# Altium PCB PCBPCB.PcbDoc
Units mil, origin at the board's own origin, x right, y up, seen from the top; angles counter-clockwise.
Board outline 2900 x 2350 mil, 2 copper layers (Top Layer, Bottom Layer); 24 components, 36 nets, 165 pads, 0 vias.
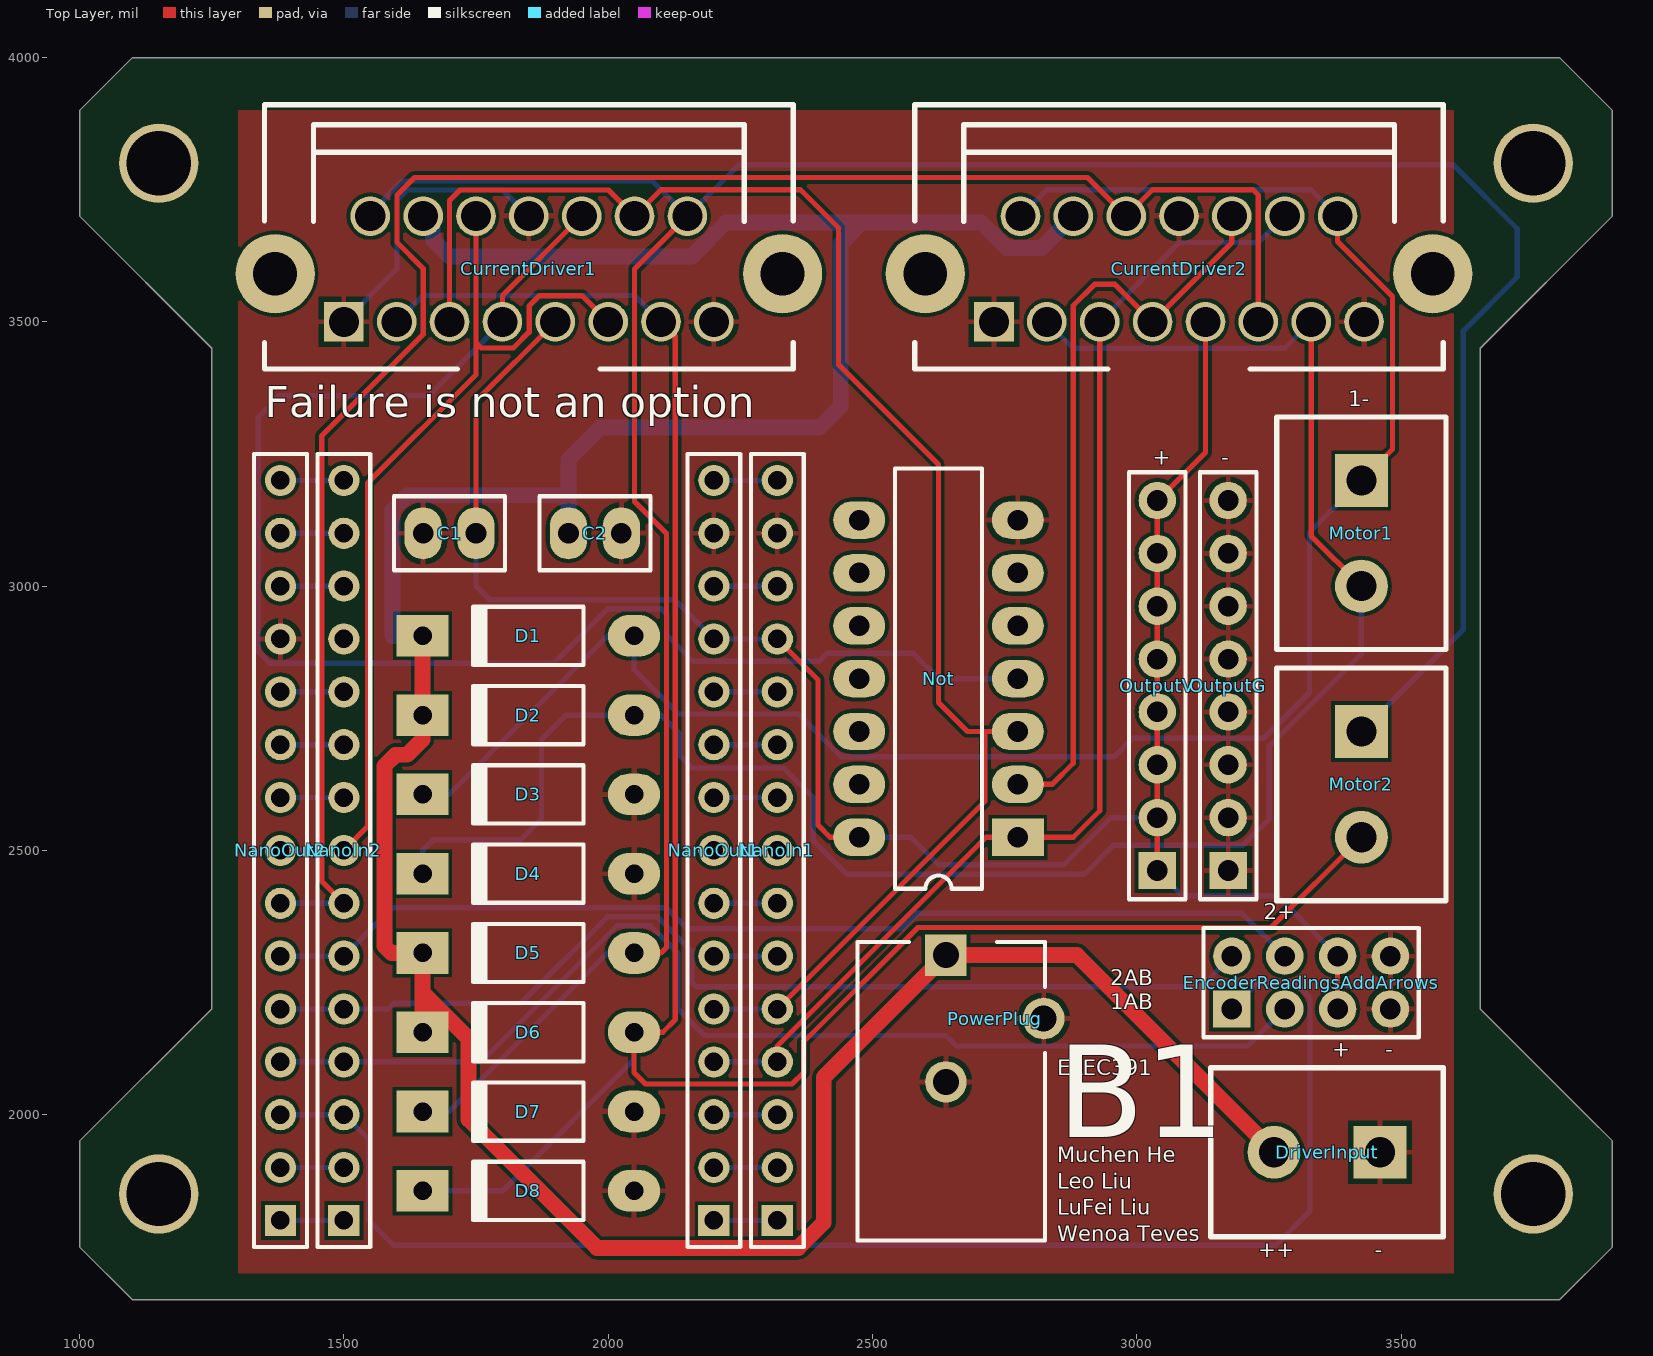
[diagram p0: Top Layer view]
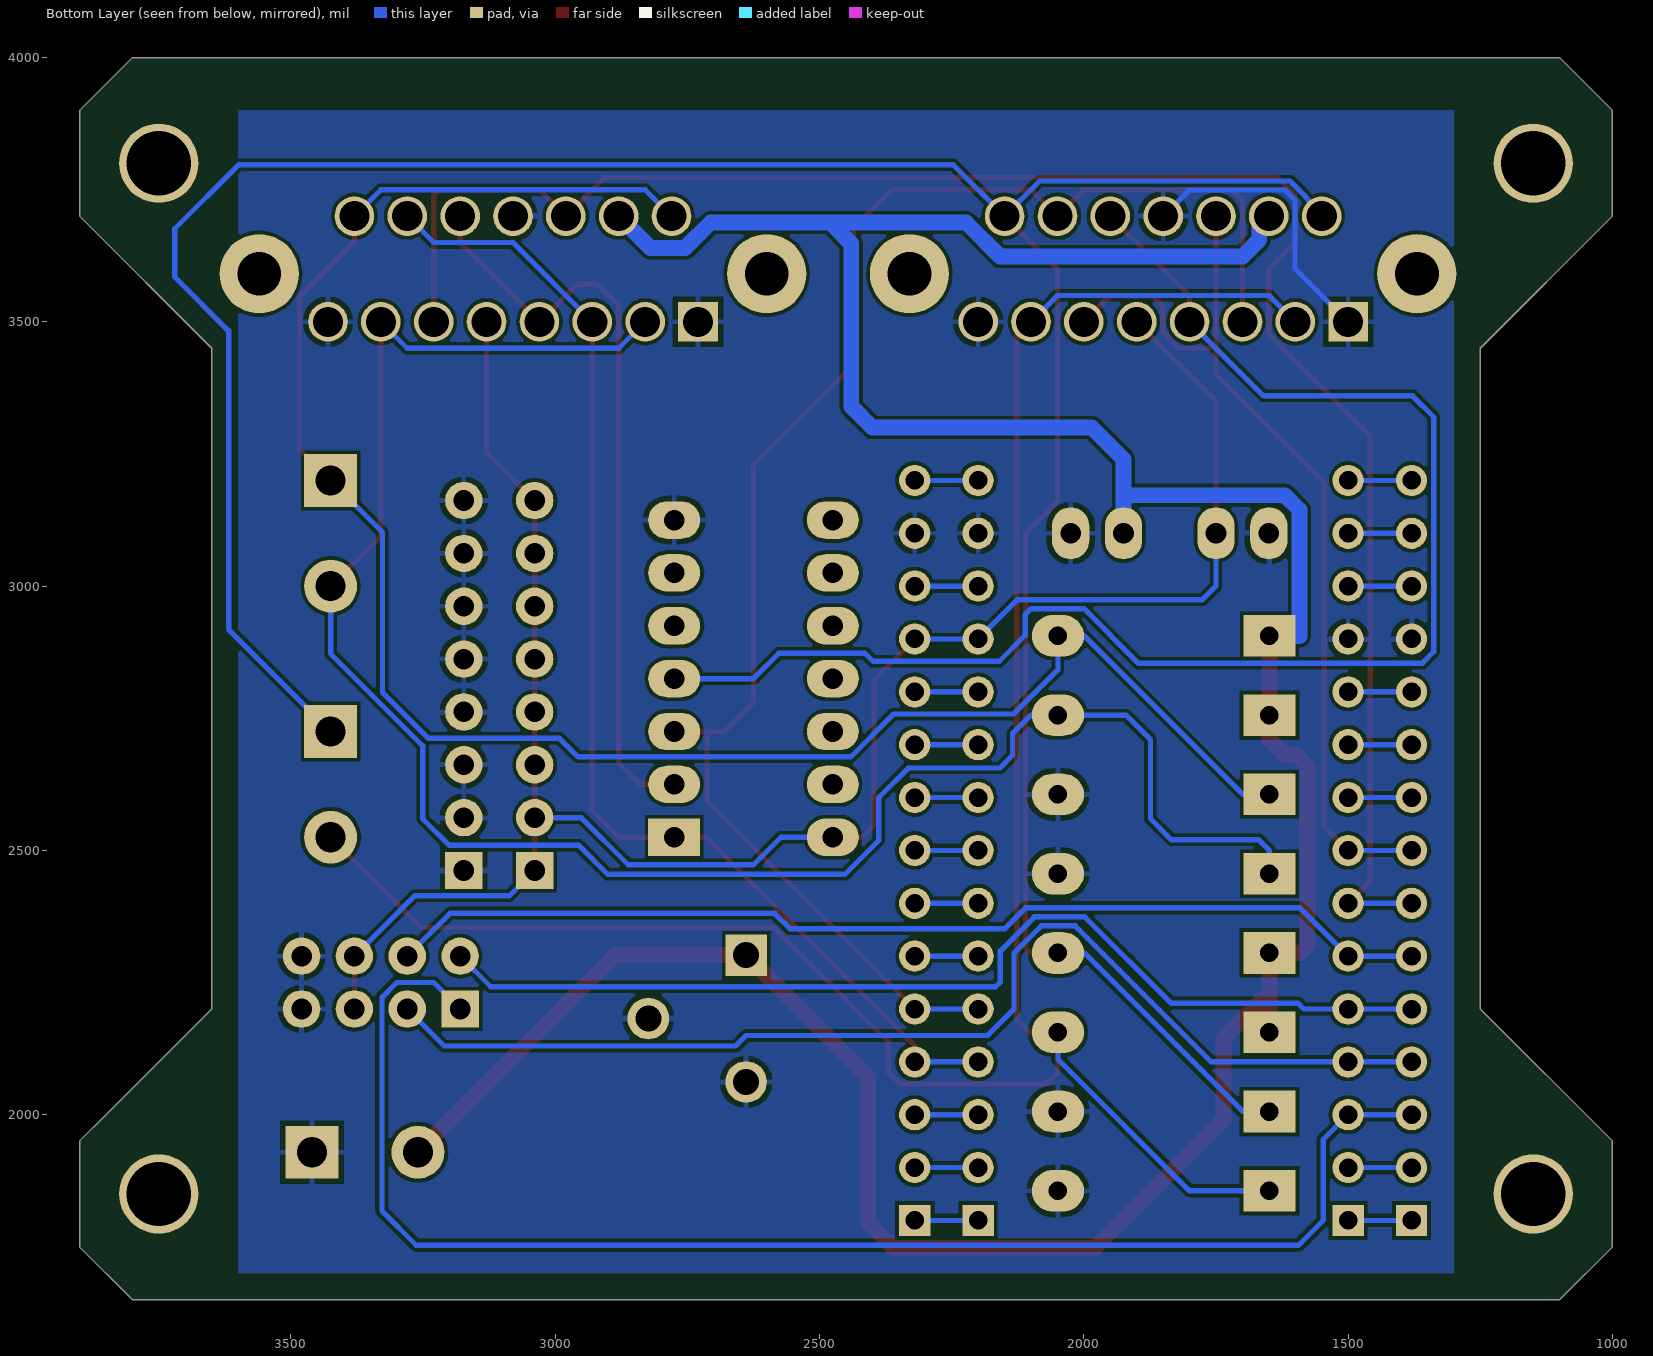
[diagram p1: Bottom Layer view, seen from below]

## Layer stack, top to bottom
Top Solder: solder mask 0.4, Solder Resist, Dk 3.5
Top Layer: signal copper 1.4
Dielectric 1: dielectric 12.6, FR-4, Dk 4.8
Bottom Layer: signal copper 1.4
Bottom Solder: solder mask 0.4, Solder Resist, Dk 3.5

## Board outline
1100,1650 1000,1750 1000,1950 1250,2200 1250,3450 1000,3700 1000,3900 1100,4000 3800,4000 3900,3900 3900,3700 3650,3450 3650,2200 3850,2000 3900,1950 3900,1750 3800,1650

## Design rules (kind name [scope] priority, off if disabled: settings)
AssemblyTestPointUsage [All] p1: valid=2
BoardOutlineClearance [All] p1: gap=10
Clearance [All] p1: gap=7
ComponentClearance [All] p1: gap=0 collisioncheckmode=3 verticalgap=0 showdistances=FALSE
FabricationTestPointUsage [All] p1: valid=2 allowmultiple=FALSE
FabricationTestPointUsage TestPointUsage [All] p2: valid=0 allowmultiple=FALSE
FabricationTestpoint Testpoint [All] p2: side=3 testpointundercomponent=TRUE minsize=40 maxsize=100 preferedsize=60 minholesize=0 maxholesize=40 preferedholesize=32 testpointgrid=1 allowsidetop=TRUE allowsidebottom=TRUE usegrid=TRUE gridtolerance=0.01
Height [All] p1: minheight=0 maxheight=2000 prefheight=500
HoleSize NPTH_withPads [(PadIsPlated = 'False') AND ((HoleDiameter < PadXSize_AllLayers ) OR (HoleDiameter < PadYSize_AllLayers))] p1: absolutevalues=TRUE maxlimit=0 minlimit=0 maxpercent=80.000 minpercent=20.000
HoleSize PadlessThruHole [(PadIsPlated = 'True') And ((HoleDiameter >= PadXSize_AllLayers ) OR (HoleDiameter >= PadYSize_AllLayers))] p2: absolutevalues=TRUE maxlimit=0 minlimit=0 maxpercent=80.000 minpercent=20.000
HoleSize HoleSize20 [HoleSize = 20 AND NOT(PadIsPlated)] p3: absolutevalues=TRUE maxlimit=20 minlimit=20 maxpercent=80.000 minpercent=20.000
HoleSize HoleSize20_p [HoleSize = 17 AND PadIsPlated] p4: absolutevalues=TRUE maxlimit=17 minlimit=17 maxpercent=80.000 minpercent=20.000
HoleSize HoleSize28 [HoleSize = 28 AND NOT(PadIsPlated)] p5: absolutevalues=TRUE maxlimit=28 minlimit=28 maxpercent=80.000 minpercent=20.000
HoleSize HoleSize28_p [HoleSize = 25 AND PadIsPlated] p6: absolutevalues=TRUE maxlimit=25 minlimit=25 maxpercent=80.000 minpercent=20.000
HoleSize HoleSize35 [HoleSize = 35 AND NOT(PadIsPlated)] p7: absolutevalues=TRUE maxlimit=35 minlimit=35 maxpercent=80.000 minpercent=20.000
HoleSize HoleSize35_p [HoleSize = 32 AND PadIsPlated] p8: absolutevalues=TRUE maxlimit=32 minlimit=32 maxpercent=80.000 minpercent=20.000
HoleSize HoleSize38 [HoleSize = 38 AND NOT(PadIsPlated)] p9: absolutevalues=TRUE maxlimit=38 minlimit=38 maxpercent=80.000 minpercent=20.000
HoleSize HoleSize38_p [HoleSize = 35 AND PadIsPlated] p10: absolutevalues=TRUE maxlimit=35 minlimit=35 maxpercent=80.000 minpercent=20.000
HoleSize HoleSize42 [HoleSize = 42 AND NOT(PadIsPlated)] p11: absolutevalues=TRUE maxlimit=42 minlimit=42 maxpercent=80.000 minpercent=20.000
HoleSize HoleSize42_p [HoleSize = 39 AND PadIsPlated] p12: absolutevalues=TRUE maxlimit=39 minlimit=39 maxpercent=80.000 minpercent=20.000
HoleSize HoleSize52 [HoleSize = 52 AND NOT(PadIsPlated)] p13: absolutevalues=TRUE maxlimit=52 minlimit=52 maxpercent=80.000 minpercent=20.000
HoleSize HoleSize52_p [HoleSize = 49 AND PadIsPlated] p14: absolutevalues=TRUE maxlimit=49 minlimit=49 maxpercent=80.000 minpercent=20.000
HoleSize HoleSize60 [HoleSize = 60 AND NOT(PadIsPlated)] p15: absolutevalues=TRUE maxlimit=60 minlimit=60 maxpercent=80.000 minpercent=20.000
HoleSize HoleSize60_p [HoleSize = 57 AND PadIsPlated] p16: absolutevalues=TRUE maxlimit=57 minlimit=57 maxpercent=80.000 minpercent=20.000
HoleSize HoleSize86 [HoleSize = 86 AND NOT(PadIsPlated)] p17: absolutevalues=TRUE maxlimit=86 minlimit=86 maxpercent=80.000 minpercent=20.000
HoleSize HoleSize86_p [HoleSize = 83 AND PadIsPlated] p18: absolutevalues=TRUE maxlimit=83 minlimit=83 maxpercent=80.000 minpercent=20.000
HoleSize HoleSize125 [HoleSize = 125 AND NOT(PadIsPlated)] p19: absolutevalues=TRUE maxlimit=125 minlimit=125 maxpercent=80.000 minpercent=20.000
HoleSize HoleSize125_p [HoleSize = 122 AND PadIsPlated] p20: absolutevalues=TRUE maxlimit=122 minlimit=122 maxpercent=80.000 minpercent=20.000
HoleSize HoleSize152 [HoleSize = 152 AND NOT(PadIsPlated)] p21: absolutevalues=TRUE maxlimit=152 minlimit=152 maxpercent=80.000 minpercent=20.000
HoleSize HoleSize152_p [HoleSize = 149 AND PadIsPlated] p22: absolutevalues=TRUE maxlimit=149 minlimit=149 maxpercent=80.000 minpercent=20.000
HoleSize HoleSizeNULL [HoleSize <> ((20 OR 28 OR 35 OR 38 OR 42 OR 52 OR 60 OR 86 OR 125 OR 152) AND NOT(PadIsPlated))] p23: absolutevalues=TRUE maxlimit=0 minlimit=0 maxpercent=80.000 minpercent=20.000
HoleSize HoleSizeNULL_p [HoleSize <> ((17 OR 25 OR 32 OR 35 OR 39 OR 49 OR 57 OR 83 OR 122 OR 149) AND PadIsPlated)] p24: absolutevalues=TRUE maxlimit=0 minlimit=0 maxpercent=80.000 minpercent=20.000
HoleSize [All] p25: absolutevalues=TRUE maxlimit=152 minlimit=1 maxpercent=80.000 minpercent=20.000
MinimumAnnularRing MinimumAnnularRing_Vias [IsVia] p1: minimumring=5
MinimumAnnularRing [All] p2: minimumring=7
MinimumSolderMaskSliver [All] p1: minsoldermaskwidth=5
PolygonConnect [All] p1: connectstyle=Relief reliefconductorwidth=10 reliefentries=4 polygonreliefangle="90 Angle" airgapwidth=10
RoutingVias RoutingViasSize_17 [HoleSize <= 17] p1: holewidth=17 width=50 viastyle="Through Hole" minholewidth=17 minwidth=27 maxholewidth=17 maxwidth=100
RoutingVias RoutingViasSize_25 [HoleSize <= 25] p2: holewidth=25 width=50 viastyle="Through Hole" minholewidth=25 minwidth=35 maxholewidth=25 maxwidth=100
RoutingVias RoutingViasSize_32 [HoleSize <= 32] p3: holewidth=32 width=50 viastyle="Through Hole" minholewidth=32 minwidth=42 maxholewidth=32 maxwidth=100
RoutingVias [All] p4: holewidth=25 width=50 viastyle="Through Hole" minholewidth=25 minwidth=50 maxholewidth=25 maxwidth=50
SilkToSilkClearance [All] p1: silktosilkclearance=0
SilkToSolderMaskClearance SilkToCopperClearance [All] p1: minsilkscreentomaskgap=10 clearancetoexposedcopper=TRUE
SilkToSolderMaskClearance [All] p2: minsilkscreentomaskgap=5 clearancetoexposedcopper=FALSE
SilkToSolderMaskClearance SilkscreenOverComponentPads [IsPad] p3: minsilkscreentomaskgap=10 clearancetoexposedcopper=TRUE
SolderMaskExpansion [All] p1: expansion=4
Width Width_VS [InNet('VS')] p1: maxlimit=500 minlimit=20 preferedwidth=30
Width [All] p2: maxlimit=10 minlimit=10 preferedwidth=10
22 further rules are at their usual default settings.

## Components (designator, comment, footprint, x,y, rotation, side; value= is the part's Value field where it differs from the comment)
C1 "G-Cap" Cap2.54mm_LGE1.0 1700,3100 r0 top
C2 "G-Cap" Cap2.54mm_LGE1.0 1975,3100 r0 top
CurrentDriver1 "Q-LN298HS" Multiwatt15_V_ELEC391HS 1850,3700 r0 top
CurrentDriver2 "Q-LN298HS" Multiwatt15_V_ELEC391HS 3080,3700 r0 top
D1 "1N4148" DO-41_XLGE1.2 1849,2906 r180 top
D2 "1N4148" DO-41_XLGE1.2 1849,2756 r180 top
D3 "1N4148" DO-41_XLGE1.2 1849,2606 r180 top
D4 "1N4148" DO-41_XLGE1.2 1849,2456 r180 top
D5 "1N4148" DO-41_XLGE1.2 1849,2306 r180 top
D6 "1N4148" DO-41_XLGE1.2 1849,2156 r180 top
D7 "1N4148" DO-41_XLGE1.2 1849,2006 r180 top
D8 "1N4148" DO-41_XLGE1.2 1849,1856 r180 top
DriverInput "Term-Block 2" TERM-BLOCK-5.08MM-2POS 3260,1929 r180 top
EncoderReadingsAddArrows "C-Hdr2x4" HDR2X4_LGE1.0 3330,2250 r0 top
Motor1 "Term-Block 2" TERM-BLOCK-5.08MM-2POS 3425,3000 r270 top
Motor2 "Term-Block 2" TERM-BLOCK-5.08MM-2POS 3425,2525 r270 top
NanoIn1 "Header 15" HDR1X15 2320,1800 r90 top
NanoIn2 "Header 15" HDR1X15 1500,1800 r90 top
NanoOut1 "Header 15" HDR1X15 2200,1800 r90 top
NanoOut2 "Header 15" HDR1X15 1380,1800 r90 top
Not "D-Not" DIP14_LGE1.0 2625,2825 r90 top
OutputG "C-Hdr1x8" HDR1X8_LGE1.0 3173,2812 r90 top
OutputV "C-Hdr1x8" HDR1X8_LGE1.0 3039,2812 r90 top
PowerPlug "C-Pwr" KLD_XLGE1.2 2731.5,2182 r90 top

## Footprints (in the part's own frame and the unit in brackets; to place one, negate y for a bottom-side part, rotate by r counter-clockwise, add the part's x,y. Pads: shape width x height; smd on the part's side, far side on the other; paste and mask are expansions set on the pad)
Cap2.54mm_LGE1.0 [mm] "Capacitor, Ceramic, Thru-Hole, Dipped Radial; Body 5.1 x 3.2 mm (WxT) Pin Spacing 2.54 mm (typ)"
  oval 1.8x2.5 hole 0.991: 1(-1.27,0) 2(1.27,0)
  silkscreen extent -2.67,-1.78 2.67,1.78
DIP14_LGE1.0 [mm] "DIP; 14 Leads; Row Spacing 7.62 mm; Pitch 2.54 mm"
  rect 1.8x2.5 hole 0.991: 1(-7.62,-3.81)
  oval 1.8x2.5 hole 0.991: 2(-5.08,-3.81) 3(-2.54,-3.81) 4(0,-3.81) 5(2.54,-3.81) 6(5.08,-3.81) 7(7.62,-3.81) 8(7.62,3.81) 9(5.08,3.81) 10(2.54,3.81) 11(0,3.81) 12(-2.54,3.81) 13(-5.08,3.81) 14(-7.62,3.81)
  silkscreen extent -10.1,-2.08 10.1,2.08, body extent -9.72,-3.93 9.78,3.94, height 5.08
DO-41_XLGE1.2 [mm] "Diode, Axial; Body 5.2 x 2.7 mm (LxDia. max), Lead Dia. 0.86 mm (max)"
  oval 2.5x2 hole 0.889: 1(-5.08,0)
  rect 2.5x2 hole 0.889: 2(5.08,0)
  silkscreen extent -2.65,-1.4 2.75,1.4, body extent -5.44,-1.28 5.49,1.28, height 2.76
HDR1X8_LGE1.0 [mm] "Connector; Header; 8 Position"
  rect 1.8x1.8 hole 0.991: 1(-8.89,0)
  round 1.8 hole 0.991: 2(-6.35,0) 3(-3.81,0) 4(-1.27,0) 5(1.27,0) 6(3.81,0) 7(6.35,0) 8(8.89,0)
  silkscreen extent -10.27,-1.36 10.25,1.36, body extent -10.13,-1.24 10.19,1.25, height 8.54
HDR1X15 [mm] "Connector; Header; 15 Position"
  rect 1.5x1.5 hole 0.889: 1(0,0)
  round 1.5 hole 0.889: 2(2.54,0) 3(5.08,0) 4(7.62,0) 5(10.16,0) 6(12.7,0) 7(15.24,0) 8(17.78,0) 9(20.32,0) 10(22.86,0) 11(25.4,0) 12(27.94,0) 13(30.48,0) 14(33.02,0) 15(35.56,0)
  silkscreen extent -1.27,-1.27 36.83,1.27
HDR2X4_LGE1.0 [mm] "Connector; Header; 4x2 Position"
  rect 1.8x1.8 hole 0.991: 1(-3.81,-1.27)
  round 1.8 hole 0.991: 2(-3.81,1.27) 3(-1.27,-1.27) 4(-1.27,1.27) 5(1.27,-1.27) 6(1.27,1.27) 7(3.81,-1.27) 8(3.81,1.27)
  silkscreen extent -5.17,-2.63 5.17,2.63, body extent -5.08,-2.51 5.08,2.54, height 8.54
KLD_XLGE1.2 [mil] "DC Power Jack, PCB Mount"
  rect 78.74x78.74 hole 49: 1(120,92.5)
  round 78.74 hole 49: 2(-120,92.5) 3(0,-92.5)
  silkscreen extent -420,-95 145,260, body extent -453,-103 145,267, height 434
Multiwatt15_V_ELEC391HS [mil]
  rect 75x75 hole 57: 1(-350,-200)
  round 75 hole 57: 2(-300,0) 3(-250,-200) 4(-200,0) 5(-150,-200) 6(-100,0) 7(-50,-200) 8(0,0) 9(50,-200) 10(100,0) 11(150,-200) 12(200,0) 13(250,-200) 14(300,0) 15(350,-200)
  round 150 hole 83: 16(480,-109) 17(-480,-109)
  silkscreen extent -500,-289 500,211, body extent -385,-200 387,157, height 826
TERM-BLOCK-5.08MM-2POS [mil] "TERM BLOCK 5.08MM VERT 2POS PCB"
  rect 100x100 hole 57: 1(-200,0)
  round 100 hole 57: 2(0,0)
  silkscreen extent -320,-160 120,160

## Part data
C1 C2: "Capacitor (specify value)"
CurrentDriver1 CurrentDriver2: "LN298 - IC Bridge Driver Par 15Multiwatt"
D1 D2 D3 D4 D5 D6 D7 D8: library part T-DiodeRect, "High-speed Diode"
DriverInput Motor1 Motor2: library part C-Block2, "Terminal-Block 1x2"
EncoderReadingsAddArrows: "Header, 4-Pin, Dual row"
NanoIn1 NanoIn2 NanoOut1 NanoOut2: "Header, 15-Pin"
Not: "Hex NOT gate (inverter)"
OutputG OutputV: "Header, 8-Pin"
PowerPlug: "Low Voltage Power Supply Connector"

## Free pads (board coordinates)
  round 150 hole 122: 2(3750,3800) 3(3750,1850) 5(1150,3800) 6(1150,1850)

## Nets (pads, with @x,y where several pads share a name; then routed paths per layer and width w, separated by ;. In a path a pad name is that pad's centre, name@x,y a point inside that pad or via, vN(x,y) a via of type N, cw(c..) or ccw(c..) an arc to the next point about the centre after c; other vN are vias at no path point)
DIREC1A: CurrentDriver2.5 CurrentDriver2.12 NanoIn1.4 NanoOut1.4 Not.1 | length 2302.2
  Top Layer w10: NanoIn1.4 2320,2130 2715,2525 Not.1 2880,2525 2930,2575 CurrentDriver2.5
  Bottom Layer w10: NanoOut1.4 NanoIn1.4 ; CurrentDriver2.5 3080,3650 3230,3650 CurrentDriver2.12
DIREC1B: CurrentDriver2.7 CurrentDriver2.10 Not.2 | length 1445.7
  Top Layer w10: Not.2 2840,2625 2880,2665 2880,3531 2920,3571 2959,3571 CurrentDriver2.7 3180,3650 CurrentDriver2.10
DIREC2A: CurrentDriver1.5 CurrentDriver1.12 NanoIn1.5 NanoOut1.5 Not.3 | length 3001.7
  Top Layer w10: CurrentDriver1.5 1700,3729.5 1720,3749.5 2000.5,3749.5 CurrentDriver1.12 2100,3750 2364,3750 2436,3678 2436,3419 2625,3230 2625,2780 2680,2725 2713,2725 ; NanoIn1.5 2713,2593 2713,2725 ; Not.3 2713,2725
  Bottom Layer w10: NanoOut1.5 NanoIn1.5
DIREC2B: CurrentDriver1.7 CurrentDriver1.10 Not.4 | length 2821.9
  Top Layer w10: CurrentDriver1.7 1800,3550 CurrentDriver1.10
  Bottom Layer w10: CurrentDriver1.7 1660,3360 1378,3360 1338,3320 1338,2876 1360,2854 1896.63,2854 2000,2957.37 2100,2957.37 2111,2946.37 2111,2907 2160,2858 2399,2858 2414,2873 2577,2873 2625,2825 Not.4
ENABLE1: CurrentDriver2.6 CurrentDriver2.11 NanoIn2.7 NanoOut2.7 | length 3515.7
  Top Layer w10: NanoIn2.7 1458,2442 1458,3284 1650,3476 1650,3601 1600.5,3650.5 1600.5,3740 1633.5,3773 2907,3773 CurrentDriver2.6 3030,3750 3220,3750 3230,3740 CurrentDriver2.11
  Bottom Layer w10: NanoOut2.7 NanoIn2.7
ENABLE2: CurrentDriver1.6 CurrentDriver1.11 NanoIn2.8 NanoOut2.8 | length 1768.2
  Top Layer w10: NanoIn2.8 1545,2545 1545,3195 1750,3400 1750,3460.5 ; CurrentDriver1.6 1750,3460.5 ; CurrentDriver1.11 1950.5,3549.5 1870,3549.5 1850.5,3530 1850.5,3480.5 1820.5,3450.5 1760,3450.5 1750,3460.5
  Bottom Layer w10: NanoOut2.8 NanoIn2.8
ENC1A: EncoderReadingsAddArrows.1 NanoIn2.3 NanoOut2.3 | length 2751.2
  Bottom Layer w10: NanoOut2.3 NanoIn2.3 1547,1953 1547,1800 1594,1753 3263,1753 3328,1818 3328,2222 3300,2250 3230,2250 EncoderReadingsAddArrows.1
ENC1B: EncoderReadingsAddArrows.3 NanoIn2.4 NanoOut2.4 | length 2191.9
  Bottom Layer w10: NanoOut2.4 NanoIn2.4 1759,2100 2016.37,2357.37 2080.63,2357.37 2132,2306 2132,2200 2182,2150 2639,2150 2659,2130 3210,2130 EncoderReadingsAddArrows.3
ENC2A: EncoderReadingsAddArrows.2 NanoIn2.5 NanoOut2.5 | length 1985.6
  Bottom Layer w10: NanoOut2.5 NanoIn2.5 1584,2200 1595,2211 1835,2211 1998.37,2374.37 2093.63,2374.37 2158,2310 2158,2251 2167,2242 3122,2242 EncoderReadingsAddArrows.2
ENC2B: EncoderReadingsAddArrows.4 NanoIn2.6 NanoOut2.6 | length 1999.7
  Bottom Layer w10: NanoOut2.6 NanoIn2.6 1591.37,2391.37 2110.13,2391.37 2149.5,2352 2556,2352 2585,2381 3199,2381 EncoderReadingsAddArrows.4
GND: C1.1 C2.2 CurrentDriver1.1 CurrentDriver1.8 CurrentDriver1.15 CurrentDriver2.1 CurrentDriver2.8 CurrentDriver2.15 D3.1 D4.1 D7.1 D8.1 DriverInput.1 EncoderReadingsAddArrows.7 EncoderReadingsAddArrows.8 NanoIn1.14 NanoIn2.12 NanoOut1.14 NanoOut2.12 Not.7 OutputG.1 OutputG.2 OutputG.3 OutputG.4 OutputG.5 OutputG.6 OutputG.7 OutputG.8 PowerPlug.2 PowerPlug.3 | length 549.7
  Bottom Layer w10: CurrentDriver1.1 1600.5,3600.5 1600.5,3730 1620,3749.5 1800.5,3749.5 CurrentDriver1.8
HOMING1: NanoIn1.8 NanoOut1.8 | length 120
  Bottom Layer w10: NanoOut1.8 NanoIn1.8
HOMING2: NanoIn1.9 NanoOut1.9 | length 120
  Bottom Layer w10: NanoOut1.9 NanoIn1.9
LASER: NanoIn2.2 NanoOut2.2 | length 120
  Bottom Layer w10: NanoOut2.2 NanoIn2.2
NetNanoIn1_1: NanoIn1.1 NanoOut1.1 | length 120
  Bottom Layer w10: NanoOut1.1 NanoIn1.1
NetNanoIn1_2: NanoIn1.2 NanoOut1.2 | length 120
  Bottom Layer w10: NanoOut1.2 NanoIn1.2
NetNanoIn1_3: NanoIn1.3 NanoOut1.3 | length 120
  Bottom Layer w10: NanoOut1.3 NanoIn1.3
NetNanoIn1_6: NanoIn1.6 NanoOut1.6 | length 120
  Bottom Layer w10: NanoOut1.6 NanoIn1.6
NetNanoIn1_7: NanoIn1.7 NanoOut1.7 | length 120
  Bottom Layer w10: NanoOut1.7 NanoIn1.7
NetNanoIn1_10: NanoIn1.10 NanoOut1.10 | length 120
  Bottom Layer w10: NanoOut1.10 NanoIn1.10
NetNanoIn1_11: NanoIn1.11 NanoOut1.11 | length 120
  Bottom Layer w10: NanoOut1.11 NanoIn1.11
NetNanoIn1_13: NanoIn1.13 NanoOut1.13 | length 120
  Bottom Layer w10: NanoOut1.13 NanoIn1.13
NetNanoIn1_15: NanoIn1.15 NanoOut1.15 | length 120
  Bottom Layer w10: NanoOut1.15 NanoIn1.15
NetNanoIn2_1: NanoIn2.1 NanoOut2.1 | length 120
  Bottom Layer w10: NanoOut2.1 NanoIn2.1
NetNanoIn2_9: NanoIn2.9 NanoOut2.9 | length 120
  Bottom Layer w10: NanoOut2.9 NanoIn2.9
NetNanoIn2_10: NanoIn2.10 NanoOut2.10 | length 120
  Bottom Layer w10: NanoOut2.10 NanoIn2.10
NetNanoIn2_11: NanoIn2.11 NanoOut2.11 | length 120
  Bottom Layer w10: NanoOut2.11 NanoIn2.11
NetNanoIn2_13: NanoIn2.13 NanoOut2.13 | length 120
  Bottom Layer w10: NanoOut2.13 NanoIn2.13
NetNanoIn2_14: NanoIn2.14 NanoOut2.14 | length 120
  Bottom Layer w10: NanoOut2.14 NanoIn2.14
NetNanoIn2_15: NanoIn2.15 NanoOut2.15 | length 120
  Bottom Layer w10: NanoOut2.15 NanoIn2.15
V1+: CurrentDriver2.3 CurrentDriver2.13 D2.1 D4.2 Motor1.2 | length 3672.4
  Top Layer w10: CurrentDriver2.13 3330,3095 Motor1.2
  Bottom Layer w10: D4.2 1649,2500 1669,2520 1834,2520 1874,2560 1874,2710 1920,2756 D2.1 2100,2756 2135,2721 2135,2680 2159,2656 2332,2656 2388,2600 2388,2519 2452,2455 2901,2455 2956,2510 3201,2510 3251,2560 3251,2698 3425,2872 Motor1.2 ; CurrentDriver2.3 2880,3450 3280,3450 CurrentDriver2.13
V1-: CurrentDriver2.2 CurrentDriver2.14 D1.1 D3.2 Motor1.1 | length 3635.7
  Top Layer w10: CurrentDriver2.14 3380,3652 3484,3548 3484,3259 Motor1.1
  Bottom Layer w10: D3.2 1699,2606 1999,2906 D1.1 2049,2842 2133,2758 2360,2758 2441,2677 2957,2677 2992,2712 3240,2712 3327,2799 3327,3102 Motor1.1 ; CurrentDriver2.2 2830,3750 3330,3750 CurrentDriver2.14
V2+: CurrentDriver1.3 CurrentDriver1.13 D6.1 D8.2 Motor2.2 | length 4203.5
  Top Layer w10: CurrentDriver1.13 2127.21,3472.79 2127.21,2180 2103.21,2156 D6.1 2049,2080 2071,2058 2348,2058 2370,2080 2370,2138 2586,2354 3254,2354 Motor2.2
  Bottom Layer w10: CurrentDriver1.3 1650,3550 2050,3550 CurrentDriver1.13 ; D8.2 1800,1856 2049,2105 D6.1
V2-: CurrentDriver1.2 CurrentDriver1.14 D5.1 D7.2 Motor2.1 | length 5430.7
  Top Layer w10: D5.1 2100,2306 2110.21,2316.21 2110.21,3099.79 2050,3160 2050,3600 CurrentDriver1.14
  Bottom Layer w10: CurrentDriver1.2 1583.5,3740 1610,3766.5 2083.5,3766.5 CurrentDriver1.14 2247,3797 3599.21,3797 3720,3676.21 3720,3585 3618,3483 3618,2918 Motor2.1 ; D7.2 1699,2006 1999,2306 D5.1
VS: C2.1 CurrentDriver1.4 CurrentDriver2.4 D1.2 D2.2 D5.2 D6.2 DriverInput.2 PowerPlug.1 | length 6357.1
  Top Layer w30: D6.2 1649,2231 ; D1.2 D2.2 1649,2710 1620,2681 1598,2681 1577,2660 1577,2319 1590,2306 D5.2 1649,2231 ; DriverInput.2 2887,2302 PowerPlug.1 2408,2071 2408,1796 2360,1748 1979,1748 1736,1991 1736,2144 1649,2231
  Bottom Layer w30: D1.2 1592,2906 1592,3144 1620,3172 1913,3172 1925,3160 ; CurrentDriver1.4 1668.28,3681.72 1668.28,3655.22 1700,3623.5 2158.5,3623.5 2223,3688 2480,3688 ; C2.1 1925,3160 ; CurrentDriver2.4 2820,3640 2754,3640 2706,3688 2480,3688 ; 1925,3160 1925,3240 1985,3300 2400,3300 2440,3340 2440,3648 2480,3688
VSS: C1.2 CurrentDriver1.9 CurrentDriver2.9 EncoderReadingsAddArrows.5 EncoderReadingsAddArrows.6 NanoIn1.12 NanoOut1.12 Not.14 OutputV.1 OutputV.2 OutputV.3 OutputV.4 OutputV.5 OutputV.6 OutputV.7 OutputV.8 | length 3851.2
  Top Layer w10: C1.2 1750,3350 CurrentDriver1.9 ; NanoIn1.12 2397,2823 2397,2548 2420,2525 Not.14 ; OutputV.1 OutputV.2 OutputV.3 OutputV.4 OutputV.5 OutputV.6 OutputV.7 OutputV.8 3130,3253 CurrentDriver2.9 ; EncoderReadingsAddArrows.5 EncoderReadingsAddArrows.6
  Bottom Layer w10: C1.2 1750,3000 1775.63,2974.37 2125.63,2974.37 NanoOut1.12 NanoIn1.12 ; Not.14 2573,2525 2625,2473 2862,2473 2951,2562 OutputV.2 ; OutputV.1 3087,2414 3266,2414 EncoderReadingsAddArrows.6
pads on no net: CurrentDriver1.16 CurrentDriver1.17 CurrentDriver2.16 CurrentDriver2.17 Not.5 Not.6 Not.8 Not.9 Not.10 Not.11 Not.12 Not.13

## Polygon pours and split planes (outlines as drawn)
GND on Top Layer "Ground" (solid, pour order 0): 1300,1700 3600,1700 3600,3900 1300,3900
GND on Bottom Layer "Ground" (solid, pour order 4): 1300,3900 1300,1700 3600,1700 3600,3900

## Silkscreen, mask and mechanical layers (free items; w line width, h text height)
Top Overlay:
  text "1-" at 3400,3340 h30
  text "Failure is not an option" at 1350,3300 h100
  text "+" at 3030,3230 h30
  text "-" at 3160,3230 h30
  text "2+" at 3240,2370 h30
  text "2AB / 1AB" at 2950,2200 h30
  text "+" at 3370,2110 h30
  text "-" at 3470,2110 h30
  text "ELEC391" at 2850,2075 h30
  text "B1" at 2850,1900 h300
  text "Muchen He / Leo Liu / LuFei Liu / Wenoa Teves" at 2850,1750 h50
  text "++" at 3230,1730 h30
  text "-" at 3450,1730 h30
Mechanical 1:
  lines w10: 1000,1750 1100,1650 1300,1650 3800,1650 3900,1750 3900,1950 3850,2000 3650,2200 3650,3450 3900,3700 3900,3900 3800,4000 1100,4000 1000,3900 1000,3700 1250,3450 1250,2200 1000,1950 1000,1750

## Dimensions
3650,3450 to 3900,3700 on Top Overlay
3800,4000 to 3900,3900 on Top Overlay
3900,3700 to 3900,3900 on Top Overlay
3650,3450 to 3900,3700 on Top Overlay
3800,4000 to 3900,3900 on Top Overlay
3750,3800 to 3750,1850 on Top Overlay
1150,3800 to 3750,3800 on Top Overlay